# Altium PCB LED.PcbDoc
Units mm, origin at the board's own origin, x right, y up, seen from the top; angles counter-clockwise.
Board outline 125 x 75 mm, 2 copper layers (Top Layer, Bottom Layer), stack 1.571 mm thick; 128 components, 191 nets, 480 pads, 77 vias.
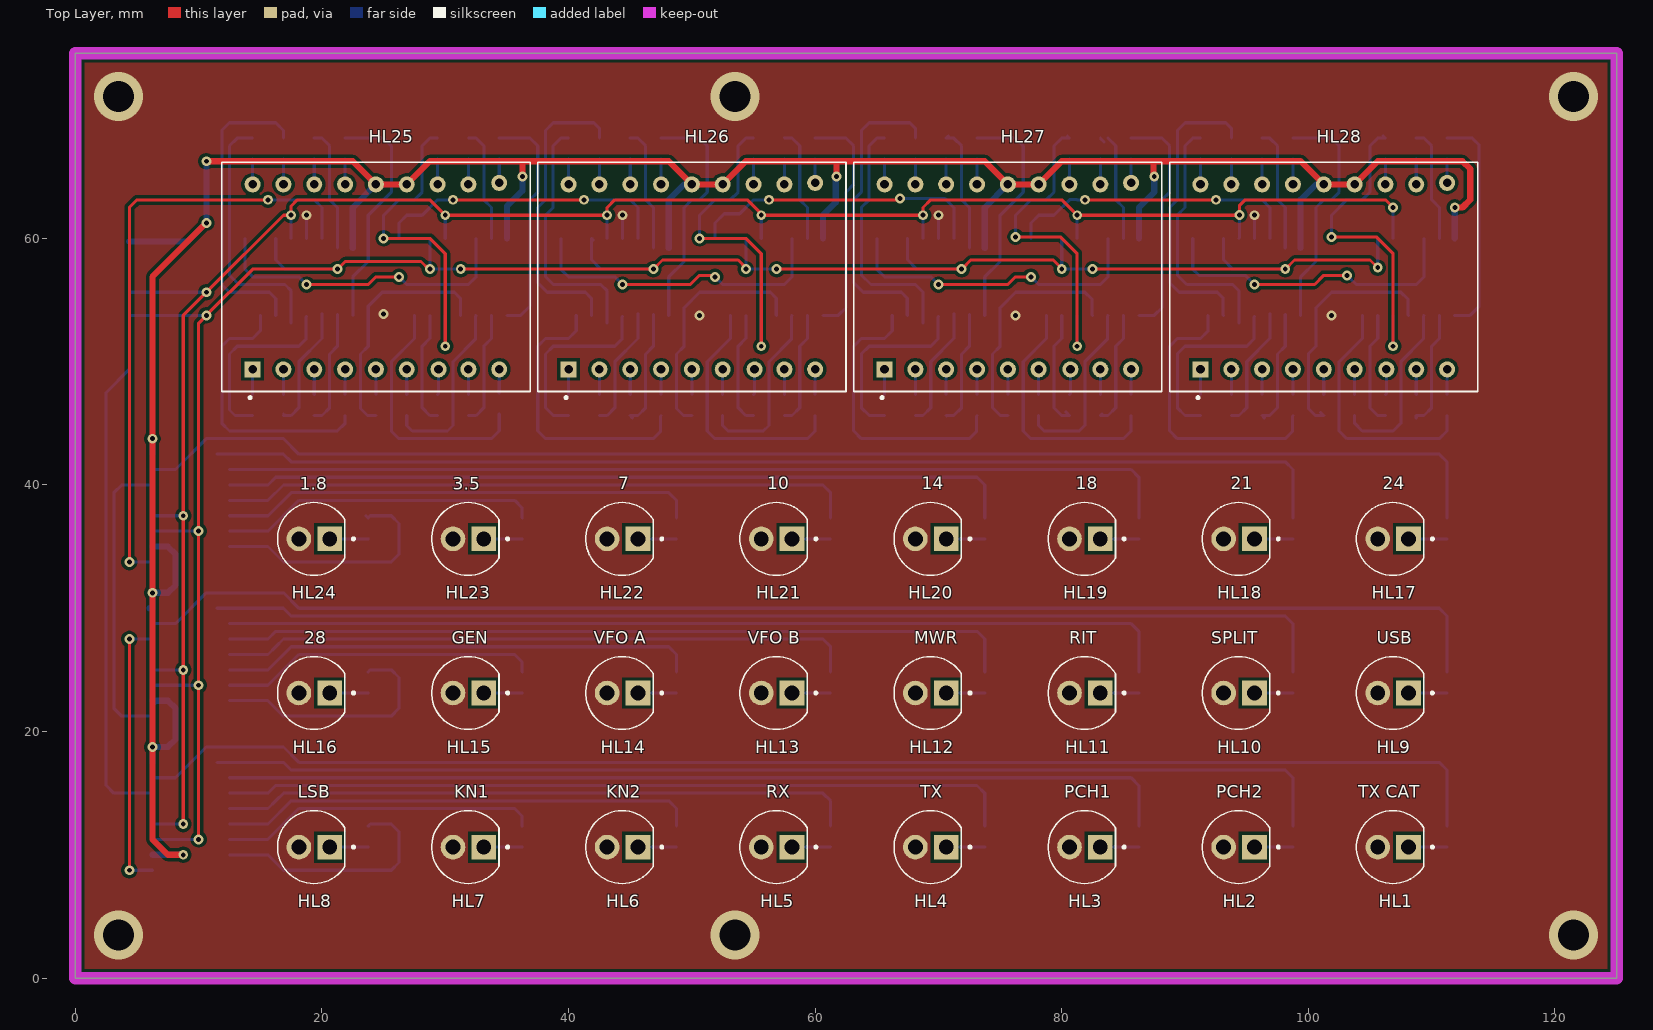
[diagram p0: Top Layer view]
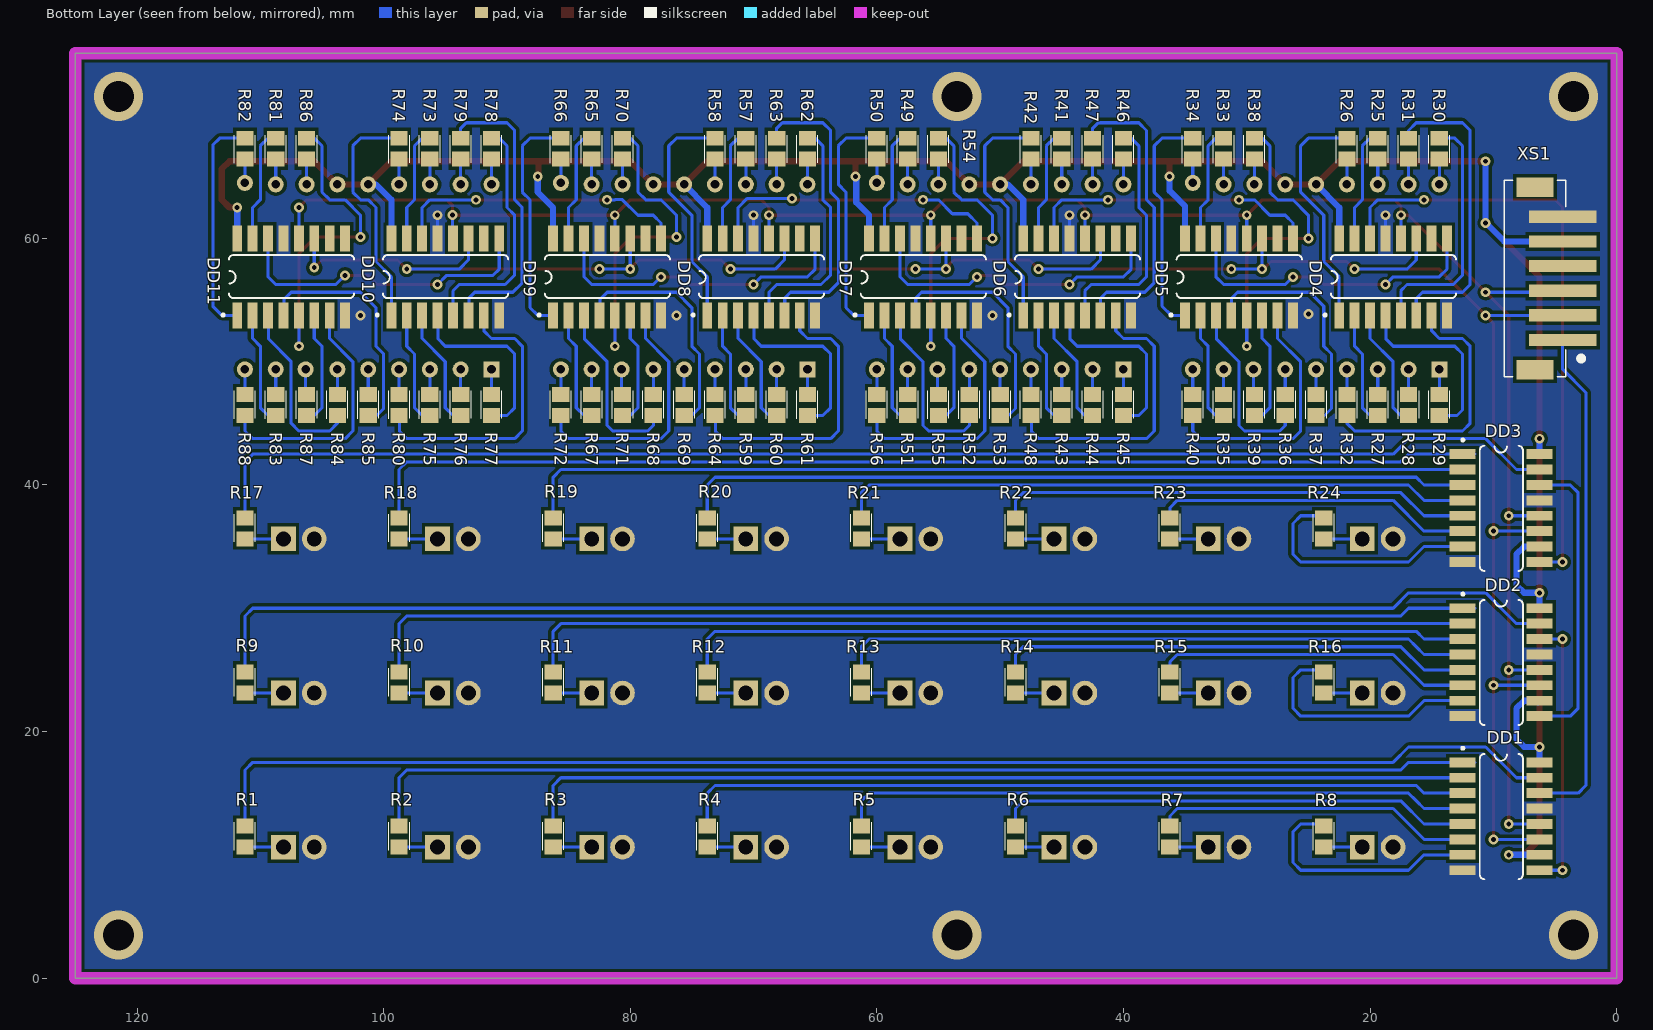
[diagram p1: Bottom Layer view, seen from below]
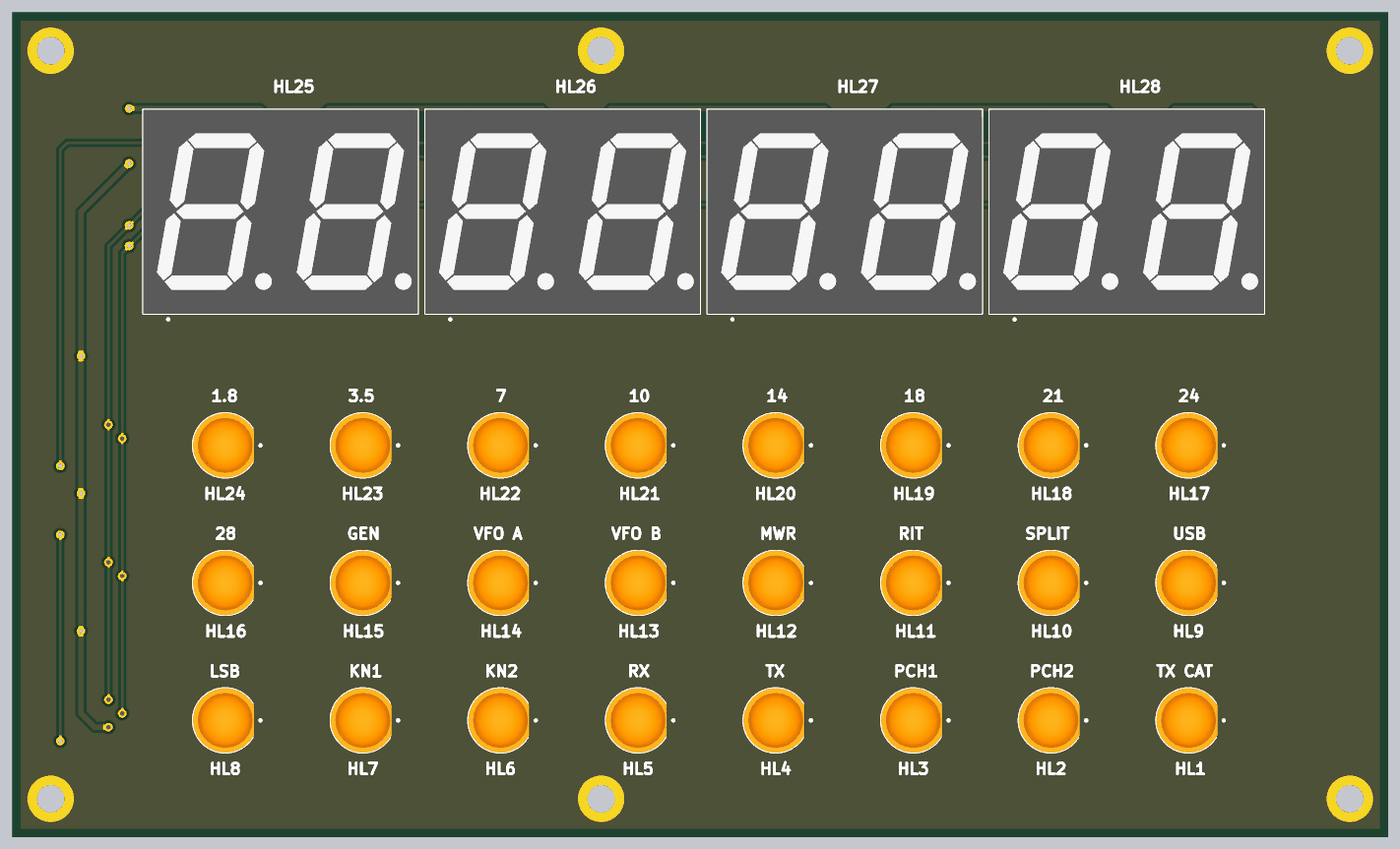
[diagram p2: 3D render of the assembled board from above, using the file's embedded part models]
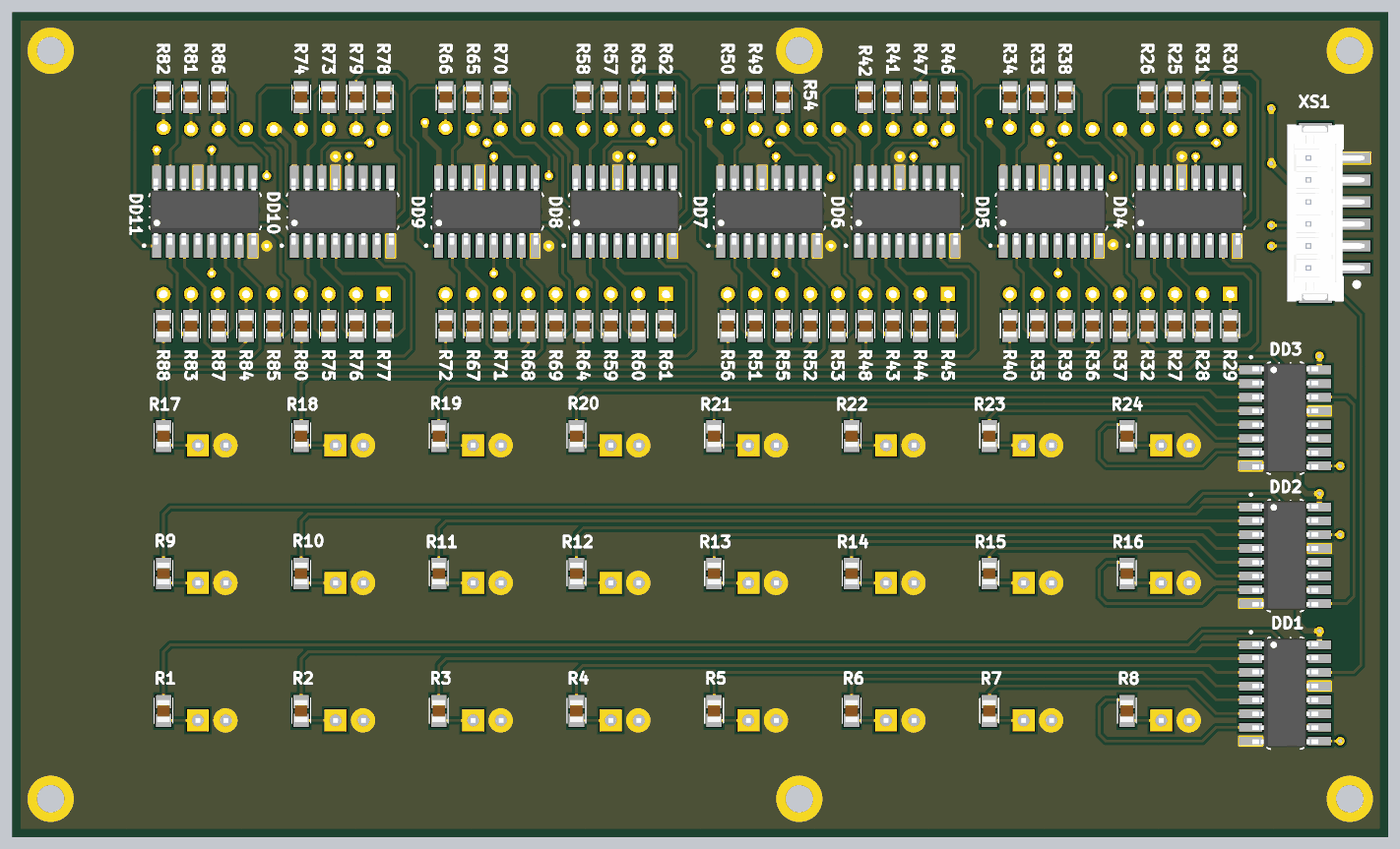
[diagram p3: 3D render of the assembled board from below, using the file's embedded part models]

## Layer stack, top to bottom
Top Solder: solder mask 0.0102, Solder Resist, Dk 3.5
Top Layer: signal copper 0.0356
Dielectric 1: dielectric 1.5, FR-4, Dk 4.8
Bottom Layer: signal copper 0.0356
Bottom Solder: solder mask 0.0102, Solder Resist, Dk 3.5

## Board outline
0,0 0,75 125,75 125,0

## Design rules (kind name [scope] priority, off if disabled: settings)
Clearance [All] p1: gap=0.254 ignorepadtopadclearanceinfootprint=FALSE except(0: Arc-Hole Track-Hole SMDPad-Hole THPad-Hole Via-Hole Fill-Hole Poly-Hole Region-Hole Text-Hole)
MinimumSolderMaskSliver [All] p1: minsoldermaskwidth=0.15
PolygonConnect [All] p1: connectstyle=Direct reliefconductorwidth=0.254 reliefentries=4 polygonreliefangle="90 Angle" airgapwidth=0.254
RoutingVias [All] p1: holewidth=0.711 width=1.27 viastyle="Through Hole" minholewidth=0.711 minwidth=1.27 maxholewidth=0.711 maxwidth=1.27
SilkToSolderMaskClearance [IsPad] p1: minsilkscreentomaskgap=0.1 clearancetoexposedcopper=TRUE
SolderMaskExpansion [All] p1: expansion=0.102 istentingtop=FALSE
Width [All] p1: maxlimit=0.5 minlimit=0.25 preferedwidth=0.25
28 further rules are at their usual default settings.

## Classes and differential pairs
component class LED: DD2 DD3 DD4 DD5 DD6 DD7 DD8 DD9 DD10 DD11 HL17 HL18 HL19 HL20 HL21 HL22 HL23 HL24 HL25 HL26 HL27 HL28 R9 R10 R11 R12 R13 R14 R15 R17 R18 R19 R20 R21 R22 R23 R24 R25 R26 R27 R28 R29 R30 R31 R32 R33 R34 R35 R36 R37 R38 R39 R40 R41 R42 R43 R44 R45 R46 R47 R48 R49 R50 R51 R52 R53 R54 R55 R56 R57 R58 R59 R60 R61 R62 R63 R64 R65 R66 R67 R68 R69 R70 R71 R72 R73 R74 R75 R76 R77 R78 R79 R80 R81 R82 R83 R84 R85 R86 R87 R88 XS1

## Components (designator, comment, footprint, x,y, rotation, side; value= is the part's Value field where it differs from the comment)
DD1 "74HC595D" 74HC595 9.375,13.126 r270 bottom
DD2 "74HC595D" 74HC595 9.375,25.625 r270 bottom
DD3 "74HC595D" 74HC595 9.375,38.125 r270 bottom
DD4 "74HC595D" 74HC595 18.125,56.875 r180 bottom
DD5 "74HC595D" 74HC595 30.625,56.875 r180 bottom
DD6 "74HC595D" 74HC595 43.75,56.875 r180 bottom
DD7 "74HC595D" 74HC595 56.25,56.875 r180 bottom
DD8 "74HC595D" 74HC595 69.375,56.875 r180 bottom
DD9 "74HC595D" 74HC595 81.875,56.875 r180 bottom
DD10 "74HC595D" 74HC595 95,56.875 r180 bottom
DD11 "74HC595D" 74HC595 107.5,56.875 r180 bottom
HL1 "LED" "LED 3mm" 108.125,10.626 r180 top
HL2 "LED" "LED 3mm" 95.625,10.626 r180 top
HL3 "LED" "LED 3mm" 83.125,10.626 r180 top
HL4 "LED" "LED 3mm" 70.625,10.626 r180 top
HL5 "LED" "LED 3mm" 58.125,10.626 r180 top
HL6 "LED" "LED 3mm" 45.625,10.626 r180 top
HL7 "LED" "LED 3mm" 33.125,10.626 r180 top
HL8 "LED" "LED 3mm" 20.625,10.626 r180 top
HL9 "LED" "LED 3mm" 108.125,23.126 r180 top
HL10 "LED" "LED 3mm" 95.625,23.126 r180 top
HL11 "LED" "LED 3mm" 83.125,23.126 r180 top
HL12 "LED" "LED 3mm" 70.625,23.126 r180 top
HL13 "LED" "LED 3mm" 58.125,23.126 r180 top
HL14 "LED" "LED 3mm" 45.625,23.126 r180 top
HL15 "LED" "LED 3mm" 33.125,23.126 r180 top
HL16 "LED" "LED 3mm" 20.625,23.126 r180 top
HL17 "LED" "LED 3mm" 108.125,35.626 r180 top
HL18 "LED" "LED 3mm" 95.625,35.626 r180 top
HL19 "LED" "LED 3mm" 83.125,35.626 r180 top
HL20 "LED" "LED 3mm" 70.625,35.626 r180 top
HL21 "LED" "LED 3mm" 58.125,35.626 r180 top
HL22 "LED" "LED 3mm" 45.625,35.626 r180 top
HL23 "LED" "LED 3mm" 33.125,35.625 r180 top
HL24 "LED" "LED 3mm" 20.625,35.625 r180 top
HL25 "LED8" LED7x2 24.375,56.875 r0 top
HL26 "LED8" LED7x2 50,56.875 r0 top
HL27 "LED8" LED7x2 75.625,56.875 r0 top
HL28 "LED8" LED7x2 101.25,56.875 r0 top
R1 "res-0.125w" res-0805-0.125 111.25,11.476 r90 bottom
R2 "res-0.125w" res-0805-0.125 98.75,11.476 r90 bottom
R3 "res-0.125w" res-0805-0.125 86.25,11.476 r90 bottom
R4 "res-0.125w" res-0805-0.125 73.75,11.476 r90 bottom
R5 "res-0.125w" res-0805-0.125 61.25,11.476 r90 bottom
R6 "res-0.125w" res-0805-0.125 48.75,11.476 r90 bottom
R7 "res-0.125w" res-0805-0.125 36.25,11.476 r90 bottom
R8 "res-0.125w" res-0805-0.125 23.75,11.476 r90 bottom
R9 "res-0.125w" res-0805-0.125 111.25,23.976 r90 bottom
R10 "res-0.125w" res-0805-0.125 98.75,23.976 r90 bottom
R11 "res-0.125w" res-0805-0.125 86.25,23.976 r90 bottom
R12 "res-0.125w" res-0805-0.125 73.75,23.976 r90 bottom
R13 "res-0.125w" res-0805-0.125 61.25,23.976 r90 bottom
R14 "res-0.125w" res-0805-0.125 48.75,23.976 r90 bottom
R15 "res-0.125w" res-0805-0.125 36.25,23.976 r90 bottom
R16 "res-0.125w" res-0805-0.125 23.75,23.976 r90 bottom
R17 "res-0.125w" res-0805-0.125 111.25,36.476 r90 bottom
R18 "res-0.125w" res-0805-0.125 98.75,36.476 r90 bottom
R19 "res-0.125w" res-0805-0.125 86.25,36.476 r90 bottom
R20 "res-0.125w" res-0805-0.125 73.75,36.476 r90 bottom
R21 "res-0.125w" res-0805-0.125 61.25,36.476 r90 bottom
R22 "res-0.125w" res-0805-0.125 48.75,36.476 r90 bottom
R23 "res-0.125w" res-0805-0.125 36.25,36.476 r90 bottom
R24 "res-0.125w" res-0805-0.125 23.75,36.475 r90 bottom
R25 "res-0.125w" res-0805-0.125 19.375,67.275 r270 bottom
R26 "res-0.125w" res-0805-0.125 21.875,67.275 r270 bottom
R27 "res-0.125w" res-0805-0.125 19.375,46.475 r90 bottom
R28 "res-0.125w" res-0805-0.125 16.875,46.475 r90 bottom
R29 "res-0.125w" res-0805-0.125 14.375,46.475 r90 bottom
R30 "res-0.125w" res-0805-0.125 14.375,67.275 r270 bottom
R31 "res-0.125w" res-0805-0.125 16.875,67.275 r270 bottom
R32 "res-0.125w" res-0805-0.125 21.875,46.475 r90 bottom
R33 "res-0.125w" res-0805-0.125 31.875,67.275 r270 bottom
R34 "res-0.125w" res-0805-0.125 34.375,67.275 r270 bottom
R35 "res-0.125w" res-0805-0.125 31.875,46.475 r90 bottom
R36 "res-0.125w" res-0805-0.125 26.875,46.475 r90 bottom
R37 "res-0.125w" res-0805-0.125 24.375,46.475 r90 bottom
R38 "res-0.125w" res-0805-0.125 29.375,67.275 r270 bottom
R39 "res-0.125w" res-0805-0.125 29.375,46.475 r90 bottom
R40 "res-0.125w" res-0805-0.125 34.375,46.475 r90 bottom
R41 "res-0.125w" res-0805-0.125 45,67.275 r270 bottom
R42 "res-0.125w" res-0805-0.125 47.5,67.275 r270 bottom
R43 "res-0.125w" res-0805-0.125 45,46.475 r90 bottom
R44 "res-0.125w" res-0805-0.125 42.5,46.475 r90 bottom
R45 "res-0.125w" res-0805-0.125 40,46.475 r90 bottom
R46 "res-0.125w" res-0805-0.125 40,67.275 r270 bottom
R47 "res-0.125w" res-0805-0.125 42.5,67.275 r270 bottom
R48 "res-0.125w" res-0805-0.125 47.5,46.475 r90 bottom
R49 "res-0.125w" res-0805-0.125 57.5,67.275 r270 bottom
R50 "res-0.125w" res-0805-0.125 60,67.275 r270 bottom
R51 "res-0.125w" res-0805-0.125 57.5,46.475 r90 bottom
R52 "res-0.125w" res-0805-0.125 52.5,46.475 r90 bottom
R53 "res-0.125w" res-0805-0.125 50,46.475 r90 bottom
R54 "res-0.125w" res-0805-0.125 55,67.275 r270 bottom
R55 "res-0.125w" res-0805-0.125 55,46.475 r90 bottom
R56 "res-0.125w" res-0805-0.125 60,46.475 r90 bottom
R57 "res-0.125w" res-0805-0.125 70.625,67.275 r270 bottom
R58 "res-0.125w" res-0805-0.125 73.125,67.275 r270 bottom
R59 "res-0.125w" res-0805-0.125 70.625,46.475 r90 bottom
R60 "res-0.125w" res-0805-0.125 68.125,46.475 r90 bottom
R61 "res-0.125w" res-0805-0.125 65.625,46.475 r90 bottom
R62 "res-0.125w" res-0805-0.125 65.625,67.275 r270 bottom
R63 "res-0.125w" res-0805-0.125 68.125,67.275 r270 bottom
R64 "res-0.125w" res-0805-0.125 73.125,46.475 r90 bottom
R65 "res-0.125w" res-0805-0.125 83.125,67.275 r270 bottom
R66 "res-0.125w" res-0805-0.125 85.625,67.275 r270 bottom
R67 "res-0.125w" res-0805-0.125 83.125,46.475 r90 bottom
R68 "res-0.125w" res-0805-0.125 78.125,46.475 r90 bottom
R69 "res-0.125w" res-0805-0.125 75.625,46.475 r90 bottom
R70 "res-0.125w" res-0805-0.125 80.625,67.275 r270 bottom
R71 "res-0.125w" res-0805-0.125 80.625,46.475 r90 bottom
R72 "res-0.125w" res-0805-0.125 85.625,46.475 r90 bottom
R73 "res-0.125w" res-0805-0.125 96.25,67.275 r270 bottom
R74 "res-0.125w" res-0805-0.125 98.75,67.275 r270 bottom
R75 "res-0.125w" res-0805-0.125 96.25,46.475 r90 bottom
R76 "res-0.125w" res-0805-0.125 93.75,46.475 r90 bottom
R77 "res-0.125w" res-0805-0.125 91.25,46.475 r90 bottom
R78 "res-0.125w" res-0805-0.125 91.25,67.275 r270 bottom
R79 "res-0.125w" res-0805-0.125 93.75,67.275 r270 bottom
R80 "res-0.125w" res-0805-0.125 98.75,46.475 r90 bottom
R81 "res-0.125w" res-0805-0.125 108.75,67.275 r270 bottom
R82 "res-0.125w" res-0805-0.125 111.25,67.275 r270 bottom
R83 "res-0.125w" res-0805-0.125 108.75,46.475 r90 bottom
R84 "res-0.125w" res-0805-0.125 103.75,46.475 r90 bottom
R85 "res-0.125w" res-0805-0.125 101.25,46.475 r90 bottom
R86 "res-0.125w" res-0805-0.125 106.25,67.275 r270 bottom
R87 "res-0.125w" res-0805-0.125 106.25,46.475 r90 bottom
R88 "res-0.125w" res-0805-0.125 111.25,46.475 r90 bottom
XS1 "Разьем 6 кон." B6B-PH-SM4-TB 4.375,56.75 r90 bottom (schematic designator XP1)

## Footprints (in the part's own frame and the unit in brackets; to place one, negate y for a bottom-side part, rotate by r counter-clockwise, add the part's x,y. Pads: shape width x height; smd on the part's side, far side on the other; paste and mask are expansions set on the pad)
74HC595 [mm]
  rect 0.8x2.1 smd: 1(-4.375,-3.125) 2(-3.125,-3.125) 3(-1.875,-3.125) 4(-0.625,-3.125) 5(0.625,-3.125) 6(1.875,-3.125) 7(3.125,-3.125) 8(4.375,-3.125) 9(4.375,3.125) 10(3.125,3.125) 11(1.875,3.125) 12(0.625,3.125) 13(-0.625,3.125) 14(-1.875,3.125) 15(-3.125,3.125) 16(-4.375,3.125)
  silkscreen extent -5.62,-3.2 5.1,1.78, body extent -4.95,-3 4.95,3, height 1.75
B6B-PH-SM4-TB [mm]
  rect 1x5.5 smd: 1(-5,0) 2(-3,0) 3(-1,0) 4(1,0) 5(3,0) 6(5,0)
  rect 1.6x3 smd: P1(-7.4,2.25) P2(7.4,2.25)
  silkscreen extent -7.98,-1.7 7.98,4.75, body extent -7.98,-2.21 7.98,4.79, height 6.75
LED7x2 [mm]
  rect 1.3x1.3 hole 0.7: 1(-10,-7.5)
  round 1.3 hole 0.7: 2(-7.5,-7.5) 3(-5,-7.5) 4(-2.5,-7.5) 5(0,-7.5) 6(2.5,-7.5) 7(5.08,-7.5) 8(7.5,-7.5) 9(10,-7.5) 10(10,7.62) 11(7.5,7.5) 12(5,7.5) 13(2.5,7.5) 14(0,7.5) 15(-2.5,7.5) 16(-5,7.5) 17(-7.5,7.5) 18(-10,7.5)
  silkscreen extent -12.5,-9.9 12.5,9.3, body extent -12.5,-9.3 12.5,9.3, height 8.06
"LED 3mm" [mm]
  rect 2x2 hole 1.2: 1(0,0)
  round 2 hole 1.2: 2(2.5,0)
  silkscreen extent -2.03,-2.96 4.23,2.96, body extent -1.33,-2.95 4.21,2.95, height 14.1
res-0805-0.125 [mm]
  rect 1.2x1.4 smd: 1(-0.85,0) 2(0.85,0)
  silkscreen extent -1.1,-0.85 1.17,0.85, body extent -1,-0.6 1,0.6, height 0.95

## Part data
HL1: "TX CAT"
HL2: "PCH2"
HL3: "PCH1"
HL4: "TX"
HL5: "RX"
HL6: "KN2"
HL7: "KN1"
HL8: "LSB"
HL9: "USB"
HL10: "SPLIT"
HL11: "RIT"
HL12: "MWR"
HL13: "VF0 B"
HL14: "VF0 A"
HL15: "GEN"
HL16: "28"
HL17: "24"
HL18: "21"
HL19: "18"
HL20: "14"
HL21: "10"
HL22: "7"
HL23: "3.5"
HL24: "1.8"
XS1: System=Connector

## Via types
v1: diameter 0.8, hole 0.4, Top Layer to Bottom Layer, 71 vias
v2: diameter 4, hole 2.5, Top Layer to Bottom Layer, 6 vias

## Nets (pads, with @x,y where several pads share a name; then routed paths per layer and width w, separated by ;. In a path a pad name is that pad's centre, name@x,y a point inside that pad or via, vN(x,y) a via of type N, cw(c..) or ccw(c..) an arc to the next point about the centre after c; other vN are vias at no path point)
"+5 В": DD1.10 DD1.16 DD2.10 DD2.16 DD3.10 DD3.16 DD4.16 DD5.16 DD6.16 DD7.16 DD8.16 DD9.16 DD10.16 DD11.16 HL25.13 HL25.14 HL26.13 HL26.14 HL27.13 HL27.14 HL28.13 HL28.14 XS1.5 | length 247.3
  Top Layer w0.5: v1(8.75,10.001) 7.5,10.001 6.25,11.251 v1(6.25,18.751) v1(6.25,31.25) v1(6.25,43.751) 6.25,56.875 v1(10.625,61.25) ; v1(10.625,66.25) 22.5,66.25 HL25.14 HL25.13 28.75,66.25 36.25,66.25 ; v1(36.25,65) 36.25,66.25 ; v1(61.721,65) 61.721,66.096 61.875,66.25 ; v1(87.5,65) 87.443,65.057 87.443,65.75 87.443,66.25 ; v1(111.875,62.5) 112.501,62.501 113.125,63.125 113.125,65.625 112.5,66.25 105.625,66.25 HL28.13 HL28.14 99.375,66.25 87.443,66.25 ; 36.25,66.25 48.125,66.25 HL26.14 HL26.13 54.375,66.25 61.875,66.25 ; 61.875,66.25 73.75,66.25 HL27.14 HL27.13 80,66.25 87.443,66.25
  Bottom Layer w0.5: XS1.5 9.125,59.75 10.624,61.249 v1(10.625,66.25) ; DD2.16@6,30 DD2.16@6.1,30 ; DD1.16 v1(6.25,18.751) 7.5,18.751 8.125,19.376 8.125,21.875 7.5,22.5 DD2.10 DD2.10@6.38,22.37 ; DD2.16 DD2.16@6.1,30 ; DD3.10 7.5,35 8.125,34.375 8.125,31.875 7.5,31.25 v1(6.25,31.25) 6.25,30.15 DD2.16@6.1,30 ; DD3.16 v1(6.25,43.751) ; DD1.10 v1(8.75,10.001) ; DD4.16@22.5,59.203 22.5,62.5 HL25.14 ; DD5.16 35,62.6 36.25,63.85 v1(36.25,65) ; DD6.16@48.125,59.203 48.125,63.125 49.375,64.375 HL26.14 ; DD7.16 60.625,61.875 61.664,62.914 61.664,64.943 v1(61.721,65) ; DD8.16@73.75,59.203 73.75,62.5 HL27.14 ; DD9.16 86.25,62.5 87.496,63.746 87.496,64.996 v1(87.5,65) ; DD10.16@99.375,59.203 99.375,63.125 100.625,64.375 HL28.14 ; DD11.16 v1(111.875,62.5)
CLK: DD1.11 DD2.11 DD3.11 DD4.11 DD5.11 DD6.11 DD7.11 DD8.11 DD9.11 DD10.11 DD11.11 XS1.2 | length 198.2
  Top Layer w0.25: v1(10,11.251) v1(10,23.751) v1(10,36.251) ; 10,35 10,53.125 v1(10.625,53.75) 14.375,57.5 v1(21.25,57.5) 21.875,58.125 28.033,58.125 28.658,57.5 v1(28.75,57.5) ; v1(31.25,57.5) v1(46.875,57.5) 47.62,58.245 53.75,58.245 54.375,57.62 v1(54.375,57.5) ; v1(56.875,57.5) v1(71.875,57.5) 72.62,58.245 79.31,58.245 80,57.555 v1(80,57.5) ; v1(82.5,57.5) v1(98.125,57.5) 98.87,58.245 105,58.245 v1(105.625,57.62)
  Bottom Layer w0.25: XS1.2 v1(10.625,53.75) ; DD3.11 v1(10,36.251) ; DD1.11 v1(10,11.251) ; DD2.11 v1(10,23.751) ; DD4.11 16.25,58.245 16.995,57.5 v1(21.25,57.5) ; DD5.11 v1(28.75,57.5) v1(31.25,57.5) ; DD6.11@42.024,59.852 DD6.11 41.875,58.245 42.62,57.5 v1(46.875,57.5) ; DD7.11 v1(54.375,57.5) v1(56.875,57.5) ; DD8.11 67.5,58.245 68.245,57.5 v1(71.875,57.5) ; DD9.11 v1(80,57.5) v1(82.5,57.5) ; DD10.11 93.125,58.245 93.87,57.5 v1(98.125,57.5) ; v1(105.625,57.62) DD11.11
DATA: DD1.14 XS1.1 | length 40.9
  Bottom Layer w0.25: XS1.1 4.375,49.375 2.5,47.5 2.5,15.626 3.125,15.001 DD1.14
GND: DD1.8 DD1.13 DD2.8 DD2.13 DD3.8 DD3.13 DD4.8 DD4.13 DD5.8 DD5.13 DD6.8 DD6.13 DD7.8 DD7.13 DD8.8 DD8.13 DD9.8 DD9.13 DD10.8 DD10.13 DD11.8 DD11.13 HL1.2 HL2.2 HL3.2 HL4.2 HL5.2 HL6.2 HL7.2 HL8.2 HL9.2 HL10.2 HL11.2 HL12.2 HL13.2 HL14.2 HL15.2 HL16.2 HL17.2 HL18.2 HL19.2 HL20.2 HL21.2 HL22.2 HL23.2 HL24.2 XS1.6 | length 7.5
  Bottom Layer w0.25: DD4.13 v1(18.75,61.875) ; DD6.13@44.375,60 v1(44.375,61.875) ; DD8.13 v1(70,61.875) ; DD10.13 v1(95.625,61.875)
  other v1: 50.625,53.75 76.25,53.75 101.875,53.75 25,53.87
  other v2: 3.5,3.5 53.5,3.5 121.5,3.5 3.5,71.5 53.5,71.5 121.5,71.5
NetDD1_1: DD1.1 R2.2 | length 91.7
  Bottom Layer w0.25: DD1.1@11.485,17.501 16.876,17.501 17.5,16.876 98.125,16.876 98.75,16.251 R2.2
NetDD1_2: DD1.2 R3.2 | length 77.3
  Bottom Layer w0.25: DD1.2 85.625,16.251 86.25,15.626 R3.2
NetDD1_3: DD1.3 R4.2 | length 64.4
  Bottom Layer w0.25: DD1.3 15.625,15.001 16.25,15.626 73.125,15.626 73.75,15.001 R4.2
NetDD1_4: DD1.4 R5.2 | length 51.6
  Bottom Layer w0.25: DD1.4 15.625,13.751 16.25,14.376 16.874,15.001 60.625,15.001 61.25,14.376 R5.2
NetDD1_5: DD1.5 R6.2 | length 38.7
  Bottom Layer w0.25: DD1.5 15.624,12.501 17.5,14.376 48.124,14.376 48.75,13.751 R6.2
NetDD1_6: DD1.6 R7.2 | length 25.8
  Bottom Layer w0.25: DD1.6 15.624,11.251 18.125,13.751 35.624,13.751 36.221,13.155 36.221,12.356 R7.2
NetDD1_7: DD1.7 R8.2 | length 19.9
  Bottom Layer w0.25: DD1.7 15.625,10.001 16.876,8.75 25.625,8.75 26.25,9.375 26.25,11.875 25.625,12.5 23.924,12.5 R8.2
NetDD1_9: DD1.9 DD2.14 | length 22.5
  Top Layer w0.25: v1(4.375,8.751) v1(4.375,27.5)
  Bottom Layer w0.25: v1(4.375,8.751) DD1.9@6.25,8.751 ; v1(4.375,27.5) DD2.14
NetDD1_15: DD1.15 R1.2 | length 111.4
  Bottom Layer w0.25: DD1.15 8.126,16.251 10.625,18.751 16.876,18.751 18.125,17.501 110.625,17.501 111.25,16.876 R1.2
NetDD2_1: DD2.1 R10.2 | length 91.7
  Bottom Layer w0.25: DD2.1@11.485,30 16.876,30 17.5,29.376 98.125,29.376 98.75,28.751 R10.2
NetDD2_2: DD2.2 R11.2 | length 77.3
  Bottom Layer w0.25: DD2.2 85.625,28.751 86.25,28.125 R11.2
NetDD2_3: DD2.3 R12.2 | length 64.4
  Bottom Layer w0.25: DD2.3 15.625,27.501 16.25,28.126 73.125,28.126 73.75,27.501 R12.2
NetDD2_4: DD2.4 R13.2 | length 51.6
  Bottom Layer w0.25: DD2.4 15.625,26.251 16.25,26.876 16.874,27.5 60.625,27.5 61.25,26.875 R13.2
NetDD2_5: DD2.5 R14.2 | length 38.7
  Bottom Layer w0.25: DD2.5 15.626,25.001 17.501,26.876 48.124,26.876 48.75,26.25 R14.2
NetDD2_6: DD2.6 R15.2 | length 25.8
  Bottom Layer w0.25: DD2.6 15.626,23.751 18.126,26.251 35.624,26.251 36.221,25.655 36.221,24.856 R15.2
NetDD2_7: DD2.7 R16.2 | length 19.9
  Bottom Layer w0.25: DD2.7 15.625,22.501 16.875,21.25 25.625,21.25 26.25,21.875 26.25,24.375 25.625,25 23.924,25 R16.2
NetDD2_9: DD2.9 DD3.14 | length 24.3
  Bottom Layer w0.25: DD2.9 3.75,21.25 3.125,21.876 3.125,39.376 3.75,40 DD3.14@6.25,40
NetDD2_15: DD2.15 R9.2 | length 111.4
  Bottom Layer w0.25: DD2.15@6.25,28.751 8.126,28.751 10.625,31.25 16.876,31.25 18.125,30.001 110.625,30.001 111.25,29.376 R9.2
NetDD3_1: DD3.1 R18.2 | length 91.7
  Bottom Layer w0.25: DD3.1@11.485,42.5 16.876,42.5 17.5,41.876 98.125,41.876 98.75,41.251 R18.2
NetDD3_2: DD3.2 R19.2 | length 77.3
  Bottom Layer w0.25: DD3.2 85.625,41.251 86.25,40.625 R19.2
NetDD3_3: DD3.3 R20.2 | length 64.4
  Bottom Layer w0.25: DD3.3 15.625,40.001 16.25,40.626 73.125,40.626 73.75,40.001 R20.2
NetDD3_4: DD3.4 R21.2 | length 51.6
  Bottom Layer w0.25: DD3.4 15.626,38.751 16.875,40 60.625,40 61.25,39.375 R21.2
NetDD3_5: DD3.5 R22.2 | length 38.7
  Bottom Layer w0.25: DD3.5 15.626,37.501 17.501,39.376 48.124,39.376 48.75,38.75 R22.2
NetDD3_6: DD3.6 R23.2 | length 25.8
  Bottom Layer w0.25: DD3.6 15.626,36.251 18.126,38.751 35.624,38.751 36.221,38.155 36.221,37.356 R23.2
NetDD3_7: DD3.7 R24.2 | length 20.1
  Bottom Layer w0.25: DD3.7 15.624,35.001 16.876,33.749 25.625,33.749 26.25,34.374 26.25,36.874 25.625,37.499 23.924,37.499 R24.2 R24.2@23.576,37.499
NetDD3_9: DD3.9 DD4.14 | length 49.3
  Top Layer w0.25: v1(4.375,33.75) 4.375,62.5 5,63.125 v1(15.625,63.125)
  Bottom Layer w0.25: v1(4.375,33.75) DD3.9 ; v1(15.625,63.125) 19.375,63.125 20,62.5 DD4.14
NetDD3_15: DD3.15 R17.2 | length 111.4
  Bottom Layer w0.25: DD3.15 8.125,41.251 10.625,43.75 16.876,43.75 18.125,42.501 110.625,42.501 111.25,41.876 R17.2
NetDD4_1: DD4.1 R26.1 | length 19.1
  Bottom Layer w0.25: R26.1 25,68.125 25.625,67.5 25.625,63.75 23.75,61.875 23.75,58.125 22.5,56.875 DD4.1
NetDD4_2: DD4.2 R27.1 | length 9.3
  Bottom Layer w0.25: R27.1 20,45.625 20.625,46.25 20.625,50.625 21.25,51.25 DD4.2@21.25,53.824
NetDD4_3: DD4.3 R28.1 | length 10
  Bottom Layer w0.25: R28.1 17.5,45.625 18.125,46.25 18.125,50 20,51.875 DD4.3@20,53.917 ; R28.1@16.875,45.745 R28.1@16.935,45.685
NetDD4_4: DD4.4 R29.1 | length 15.2
  Bottom Layer w0.25: R29.1 12.95,45.625 12.5,46.075 12.5,50.625 13.125,51.25 18.125,51.25 18.718,51.843 18.718,53.633 DD4.4@18.75,53.665
NetDD4_5: DD4.5 R30.1 | length 20.8
  Bottom Layer w0.25: R30.1 13.125,68.125 12.5,67.5 12.5,56.995 13.245,56.25 16.995,56.25 17.5,55.745 DD4.5@17.5,53.125
NetDD4_6: DD4.6 R31.1 | length 24.9
  Bottom Layer w0.25: DD4.6 16.25,55.12 15.745,55.625 12.5,55.625 11.875,56.25 11.875,68.75 12.5,69.375 16.25,69.375 16.875,68.75 R31.1
NetDD4_7: DD4.7 R32.1 | length 22.3
  Bottom Layer w0.25: DD4.7 15,52.5 14.375,51.875 12.5,51.875 11.875,51.25 11.875,45 12.5,44.375 21.25,44.375 21.875,45 R32.1
NetDD4_9: DD4.9 DD5.14 | length 25.7
  Top Layer w0.25: v1(18.75,56.25) 23.75,56.25 24.375,56.875 v1(26.25,56.875)
  Bottom Layer w0.25: DD4.9 13.75,57.5 14.375,56.875 18.125,56.875 v1(18.75,56.25) ; v1(26.25,56.875) 26.875,56.25 31.875,56.25 32.5,56.875 DD5.14
NetDD4_15: DD4.15 R25.1 | length 10
  Bottom Layer w0.25: R25.1 20,68.125 20.625,67.5 20.625,63.125 21.25,62.5 DD4.15@21.25,59.225
NetDD5_1: DD5.1 R34.1 | length 18.8
  Bottom Layer w0.25: R34.1 36.875,68.125 37.5,67.5 37.5,63.75 36.875,63.125 36.875,54.495 36.13,53.75 DD5.1
NetDD5_2: DD5.2 R35.1 | length 9.3
  Bottom Layer w0.25: R35.1 32.5,45.625 33.125,46.25 33.125,51.25 33.75,51.875 DD5.2
NetDD5_3: DD5.3 R36.1 | length 14.6
  Bottom Layer w0.25: R36.1 26.875,44.825 27.325,44.375 30.175,44.375 30.625,44.825 30.625,50 32.468,51.843 32.468,53.718 DD5.3
NetDD5_4: DD5.4 R37.1 | length 19.6
  Bottom Layer w0.25: R37.1 23.695,45.625 23.125,46.195 23.125,50.625 23.75,51.25 23.75,54.495 24.88,55.625 30.745,55.625 31.218,55.152 31.218,53.782 DD5.4
NetDD5_5: DD5.5 R38.1 | length 26.6
  Top Layer w0.25: v1(25,60) 28.75,60 30,58.75 v1(30,51.25)
  Bottom Layer w0.25: v1(25,60) 25,61.875 26.25,63.125 27.5,63.125 28.125,63.75 28.125,67.5 28.75,68.125 R38.1 ; v1(30,51.25) DD5.5
NetDD5_6: DD5.6 R39.1 | length 9.3
  Bottom Layer w0.25: DD5.6 28.75,51.875 28.125,51.25 28.125,46.25 28.75,45.625 R39.1
NetDD5_7: DD5.7 R40.1 | length 20.8
  Bottom Layer w0.25: DD5.7 27.5,51.875 25.625,50 25.625,44.375 26.25,43.75 33.75,43.75 34.375,44.375 R40.1@34.375,45.745
NetDD5_9: DD5.9 DD6.14 | length 24.2
  Top Layer w0.25: v1(30.625,63.125) v1(41.25,63.125)
  Bottom Layer w0.25: DD5.9 26.25,61.25 26.875,61.875 28.125,61.875 29.375,63.125 v1(30.625,63.125) ; v1(41.25,63.125) 45,63.125 45.625,62.5 DD6.14
NetDD5_15: DD5.15 R33.1 | length 9.3
  Bottom Layer w0.25: R33.1 32.5,68.125 33.125,67.5 33.125,63.125 33.75,62.5 DD5.15
NetDD6_1: DD6.1 R42.1 | length 19.4
  Bottom Layer w0.25: R42.1 50.625,68.125 51.25,67.5 51.25,63.75 50.625,63.125 50,63.125 49.375,62.5 49.375,58.125 48.125,56.875 DD6.1
NetDD6_2: DD6.2 R43.1 | length 9.6
  Bottom Layer w0.25: R43.1@45.175,45.45 R43.1 45.625,45.625 46.25,46.25 46.25,50.625 46.875,51.25 DD6.2@46.875,53.824
NetDD6_3: DD6.3 R44.1 | length 10
  Bottom Layer w0.25: R44.1 43.125,45.625 43.75,46.25 43.75,50 45.625,51.875 DD6.3@45.625,53.917
NetDD6_4: DD6.4 R45.1 | length 15.1
  Bottom Layer w0.25: R45.1 38.75,45.625 38.125,46.25 38.125,50.625 38.75,51.25 43.75,51.25 44.343,51.843 44.343,53.633 DD6.4@44.375,53.665
NetDD6_5: DD6.5 R46.1 | length 20.5
  Bottom Layer w0.25: R46.1 39.375,68.125 38.75,67.5 38.75,62.5 38.125,61.875 38.125,56.875 38.75,56.25 42.62,56.25 43.125,55.745 DD6.5@43.125,53.125
NetDD6_6: DD6.6 R47.1 | length 24.5
  Bottom Layer w0.25: DD6.6 41.843,53.782 41.843,55.152 41.37,55.625 38.271,55.625 37.5,56.396 37.5,62.5 38.125,63.125 38.125,68.75 38.75,69.375 42.05,69.375 42.5,68.925 R47.1
NetDD6_7: DD6.7 R48.1 | length 23.5
  Bottom Layer w0.25: DD6.7 40.625,52.5 40,51.875 38.125,51.875 37.5,51.25 37.5,44.375 38.125,43.75 46.875,43.75 47.468,44.343 47.468,45.593 R48.1
NetDD6_9: DD6.9 DD7.14 | length 25.8
  Top Layer w0.25: v1(44.375,56.25) 49.88,56.25 50.625,56.995 51.106,56.995 51.121,56.98 51.77,56.98 v1(51.875,56.875)
  Bottom Layer w0.25: DD6.9 39.375,57.5 40,56.875 43.75,56.875 v1(44.375,56.25) ; v1(51.875,56.875) 52.5,56.25 57.5,56.25 58.125,56.875 DD7.14@58.125,60
NetDD6_15: DD6.15 R41.1 | length 10.1
  Bottom Layer w0.25: R41.1@45.026,68.151 R41.1 45.625,68.125 46.25,67.5 46.25,63.125 46.875,62.5 DD6.15@46.875,59.225
NetDD7_1: DD7.1 R50.1 | length 18.9
  Bottom Layer w0.25: R50.1 62.5,68.125 63.125,67.5 63.125,64.375 62.5,63.75 62.5,54.375 61.875,53.75 DD7.1
NetDD7_2: DD7.2 R51.1 | length 9.3
  Bottom Layer w0.25: R51.1 58.125,45.625 58.75,46.25 58.75,51.25 59.375,51.875 DD7.2
NetDD7_3: DD7.3 R52.1 | length 14.6
  Bottom Layer w0.25: R52.1 52.5,44.825 52.95,44.375 55.8,44.375 56.25,44.825 56.25,50 58.093,51.843 58.093,53.718 DD7.3@58.125,53.75
NetDD7_4: DD7.4 R53.1 | length 19.5
  Bottom Layer w0.25: R53.1 49.32,45.625 48.75,46.195 48.75,50.625 49.375,51.25 49.375,54.375 50.625,55.625 56.37,55.625 56.843,55.152 56.843,53.782 DD7.4
NetDD7_5: DD7.5 R54.1 | length 26.6
  Top Layer w0.25: v1(50.625,60) 54.375,60 55.625,58.75 v1(55.625,51.25)
  Bottom Layer w0.25: v1(50.625,60) 50.625,61.875 51.875,63.125 53.125,63.125 53.75,63.75 53.75,67.5 54.375,68.125 R54.1 ; v1(55.625,51.25) DD7.5
NetDD7_6: DD7.6 R55.1 | length 9.3
  Bottom Layer w0.25: DD7.6 54.375,51.875 53.75,51.25 53.75,46.25 54.375,45.625 R55.1
NetDD7_7: DD7.7 R56.1 | length 20.7
  Bottom Layer w0.25: DD7.7 53.125,51.875 51.25,50 51.25,44.375 51.875,43.75 59.375,43.75 60,44.375 R56.1
NetDD7_9: DD7.9 DD8.14 | length 24.3
  Top Layer w0.25: v1(56.25,63.125) 66.606,63.125 66.726,63.245 v1(66.875,63.245)
  Bottom Layer w0.25: DD7.9 51.875,61.25 52.62,61.995 53.87,61.995 55,63.125 v1(56.25,63.125) ; v1(66.875,63.245) 70.505,63.245 71.25,62.5 DD8.14
NetDD7_15: DD7.15 R49.1 | length 9.3
  Bottom Layer w0.25: R49.1@57.526,68.151 R49.1 58.125,68.125 58.75,67.5 58.75,63.125 59.375,62.5 DD7.15
NetDD8_1: DD8.1 R58.1 | length 19.1
  Bottom Layer w0.25: R58.1 76.25,68.125 76.875,67.5 76.875,63.75 75,61.875 75,58.125 73.75,56.875 DD8.1
NetDD8_2: DD8.2 R59.1 | length 9.4
  Bottom Layer w0.25: R59.1@70.651,45.599 R59.1 71.25,45.625 71.875,46.25 71.875,50.625 72.5,51.25 DD8.2@72.5,53.824
NetDD8_3: DD8.3 R60.1 | length 10
  Bottom Layer w0.25: R60.1 68.75,45.625 69.375,46.25 69.375,50 71.25,51.875 DD8.3@71.25,53.917
NetDD8_4: DD8.4 R61.1 | length 15.1
  Bottom Layer w0.25: R61.1 64.375,45.625 63.75,46.25 63.75,50.625 64.375,51.25 69.375,51.25 69.968,51.843 69.968,53.633 DD8.4@70,53.665
NetDD8_5: DD8.5 R62.1 | length 20.3
  Bottom Layer w0.25: R62.1 65,68.125 64.375,67.5 64.375,63.125 63.75,62.5 63.75,57.021 64.521,56.25 68.125,56.25 68.75,55.625 DD8.5@68.75,53.125
NetDD8_6: DD8.6 R63.1 | length 24.5
  Bottom Layer w0.25: DD8.6 67.468,53.782 67.468,55.152 66.995,55.625 63.896,55.625 63.125,56.396 63.125,63.125 63.75,63.75 63.75,68.75 64.375,69.375 67.675,69.375 68.125,68.925 R63.1
NetDD8_7: DD8.7 R64.1 | length 23.5
  Bottom Layer w0.25: DD8.7 66.25,52.5 65.625,51.875 63.75,51.875 63.125,51.25 63.125,44.375 63.75,43.75 72.5,43.75 73.093,44.343 73.093,45.593 R64.1
NetDD8_9: DD8.9 DD9.14 | length 25.7
  Top Layer w0.25: v1(70,56.25) 75.625,56.25 76.25,56.875 v1(77.5,56.875)
  Bottom Layer w0.25: DD8.9 65,57.5 65.625,56.875 69.375,56.875 v1(70,56.25) ; v1(77.5,56.875) 78.125,56.25 83.125,56.25 83.75,56.875 DD9.14
NetDD8_15: DD8.15 R57.1 | length 10.3
  Bottom Layer w0.25: R57.1@70.8,68.3 R57.1 71.25,68.125 71.875,67.5 71.875,63.125 72.5,62.5 DD8.15 DD8.15@72.5,59.225
NetDD9_1: DD9.1 R66.1 | length 18.9
  Bottom Layer w0.25: R66.1 87.5,68.125 88.125,68.125 88.75,67.5 88.75,63.75 88.125,63.125 88.125,54.375 87.5,53.75 DD9.1
NetDD9_2: DD9.2 R67.1 | length 9.4
  Bottom Layer w0.25: R67.1@83.254,45.754 R67.1 83.75,45.625 84.375,46.25 84.375,51.25 85,51.875 DD9.2
NetDD9_3: DD9.3 R68.1 | length 14.6
  Bottom Layer w0.25: R68.1 78.125,44.825 78.575,44.375 81.425,44.375 81.875,44.825 81.875,50 83.718,51.843 83.718,53.718 DD9.3
NetDD9_4: DD9.4 R69.1 | length 19.4
  Bottom Layer w0.25: R69.1 75,45.625 74.375,46.25 74.375,50.625 75,51.25 75,54.375 76.25,55.625 81.875,55.625 82.468,55.032 82.468,53.782 DD9.4
NetDD9_5: DD9.5 R70.1 | length 26.7
  Top Layer w0.25: v1(76.25,60.12) 79.88,60.12 81.25,58.75 v1(81.25,51.25)
  Bottom Layer w0.25: v1(76.25,60.12) 76.25,61.875 77.5,63.125 78.75,63.125 79.375,63.75 79.375,67.5 80,68.125 R70.1 R70.1@80.45,68.3 ; v1(81.25,51.25) DD9.5
NetDD9_6: DD9.6 R71.1 | length 9.7
  Bottom Layer w0.25: DD9.6 80,51.875 79.375,51.25 79.375,46.25 80,45.625 R71.1 R71.1@80.321,45.929
NetDD9_7: DD9.7 R72.1 | length 20.7
  Bottom Layer w0.25: DD9.7 78.75,51.875 76.875,50 76.875,44.375 77.5,43.75 85,43.75 85.625,44.375 R72.1
NetDD9_9: DD9.9 DD10.14 | length 24.2
  Top Layer w0.25: v1(81.875,63.125) v1(92.5,63.125)
  Bottom Layer w0.25: DD9.9 77.5,61.25 78.125,61.875 79.375,61.875 80.64,63.14 81.235,63.14 81.25,63.125 v1(81.875,63.125) ; v1(92.5,63.125) 96.25,63.125 96.875,62.5 DD10.14
NetDD9_15: DD9.15 R65.1 | length 9.1
  Bottom Layer w0.25: R65.1 R65.1@83.429,67.821 ; R65.1@83.75,68.125 84.375,67.5 84.375,63.125 85,62.5 DD9.15
NetDD10_1: DD10.1 R74.1 | length 19.4
  Bottom Layer w0.25: R74.1 101.875,68.125 102.5,67.5 102.5,63.75 101.875,63.125 101.25,63.125 100.625,62.5 100.625,58.125 99.375,56.875 DD10.1
NetDD10_2: DD10.2 R75.1 | length 9.6
  Bottom Layer w0.25: R75.1@96.425,45.45 R75.1 96.875,45.625 97.5,46.25 97.5,50.625 98.125,51.25 DD10.2 DD10.2@98.125,53.824
NetDD10_3: DD10.3 R76.1 | length 10
  Bottom Layer w0.25: R76.1 94.375,45.625 95,46.25 95,50 96.875,51.875 DD10.3 DD10.3@96.875,53.917
NetDD10_4: DD10.4 R77.1 | length 15.1
  Bottom Layer w0.25: R77.1 90,45.625 89.375,46.25 89.375,50.625 90,51.25 95,51.25 95.593,51.843 95.593,53.633 DD10.4@95.625,53.665
NetDD10_5: DD10.5 R78.1 | length 20.4
  Bottom Layer w0.25: R78.1 90.625,68.125 90,67.5 90,62.5 89.375,61.875 89.375,57.021 90.146,56.25 93.87,56.25 94.375,55.745 DD10.5@94.375,53.125
NetDD10_6: DD10.6 R79.1 | length 24.5
  Bottom Layer w0.25: DD10.6 93.093,53.782 93.093,55.152 92.62,55.625 89.521,55.625 88.783,56.363 88.783,62.533 89.375,63.125 89.375,68.75 90,69.375 93.3,69.375 93.75,68.925 R79.1
NetDD10_7: DD10.7 R80.1 | length 23.5
  Bottom Layer w0.25: DD10.7 91.875,52.5 91.25,51.875 89.375,51.875 88.75,51.25 88.75,44.375 89.375,43.75 98.125,43.75 98.718,44.343 98.718,45.593 R80.1
NetDD10_9: DD10.9 DD11.14 | length 25.8
  Top Layer w0.25: v1(95.625,56.25) 100.505,56.25 101.25,56.995 v1(103.125,56.995)
  Bottom Layer w0.25: DD10.9 90.625,57.5 91.13,56.995 94.88,56.995 v1(95.625,56.25) ; v1(103.125,56.995) 103.87,56.25 108.75,56.25 109.375,56.875 DD11.14
NetDD10_15: DD10.15 R73.1 | length 10
  Bottom Layer w0.25: R73.1 96.875,68.125 97.5,67.5 97.5,63.125 98.125,62.5 DD10.15@98.125,59.225
NetDD11_1: DD11.1 R82.1 | length 18.2
  Bottom Layer w0.25: R82.1 113.3,68.125 113.854,67.571 113.854,54.479 113.125,53.75 DD11.1
NetDD11_2: DD11.2 R83.1 | length 9.4
  Bottom Layer w0.25: R83.1@108.75,45.45 R83.1 109.375,45.625 110,46.25 110,51.25 110.625,51.875 DD11.2
NetDD11_3: DD11.3 R84.1 | length 14.4
  Bottom Layer w0.25: R84.1 103.75,45 104.375,44.375 106.875,44.375 107.5,45 107.5,50 109.343,51.843 109.343,53.718 DD11.3
NetDD11_4: DD11.4 R85.1 | length 19.8
  Bottom Layer w0.25: R85.1@101.001,45.874 R85.1 100.57,45.625 100,46.195 100,50.625 100.625,51.25 100.625,54.375 101.875,55.625 107.5,55.625 108.093,55.032 108.093,53.782 DD11.4
NetDD11_5: DD11.5 R86.1 | length 26.7
  Top Layer w0.25: v1(101.875,60.12) 105.505,60.12 106.875,58.75 v1(106.875,51.25)
  Bottom Layer w0.25: v1(101.875,60.12) 101.875,61.875 103.125,63.125 104.375,63.125 105,63.75 105,67.5 105.625,68.125 R86.1 R86.1@106.075,68.3 ; v1(106.875,51.25) DD11.5
NetDD11_6: DD11.6 R87.1 | length 9.3
  Bottom Layer w0.25: DD11.6 105.625,51.875 105,51.25 105,46.25 105.625,45.625 R87.1
NetDD11_7: DD11.7 R88.1 | length 20.7
  Bottom Layer w0.25: DD11.7 104.375,51.875 102.5,50 102.5,44.375 103.125,43.75 110.625,43.75 111.25,44.375 R88.1
NetDD11_15: DD11.15 R81.1 | length 9.3
  Bottom Layer w0.25: R81.1 109.375,68.125 110,67.5 110,63.125 110.625,62.5 DD11.15
NetHL1_1: HL1.1 R1.1 | length 3.1
  Bottom Layer w0.25: HL1.1 R1.1
NetHL2_1: HL2.1 R2.1 | length 3.1
  Bottom Layer w0.25: HL2.1 R2.1
NetHL3_1: HL3.1 R3.1 | length 3.1
  Bottom Layer w0.25: HL3.1 R3.1
NetHL4_1: HL4.1 R4.1 | length 3.1
  Bottom Layer w0.25: HL4.1 R4.1
NetHL5_1: HL5.1 R5.1 | length 3.1
  Bottom Layer w0.25: HL5.1 R5.1
NetHL6_1: HL6.1 R6.1 | length 3.1
  Bottom Layer w0.25: HL6.1 R6.1
NetHL7_1: HL7.1 R7.1 | length 3.1
  Bottom Layer w0.25: HL7.1 R7.1
NetHL8_1: HL8.1 R8.1 | length 3.1
  Bottom Layer w0.25: HL8.1 R8.1
NetHL9_1: HL9.1 R9.1 | length 3.1
  Bottom Layer w0.25: HL9.1 R9.1
NetHL10_1: HL10.1 R10.1 | length 3.1
  Bottom Layer w0.25: HL10.1 R10.1@98.75,23.126
NetHL11_1: HL11.1 R11.1 | length 3.1
  Bottom Layer w0.25: HL11.1 R11.1
NetHL12_1: HL12.1 R12.1 | length 3.1
  Bottom Layer w0.25: HL12.1 R12.1
NetHL13_1: HL13.1 R13.1 | length 3.1
  Bottom Layer w0.25: HL13.1@58.125,23.126 R13.1
NetHL14_1: HL14.1 R14.1 | length 3.1
  Bottom Layer w0.25: HL14.1 R14.1@48.75,23.126
NetHL15_1: HL15.1 R15.1 | length 3.1
  Bottom Layer w0.25: HL15.1 R15.1
NetHL16_1: HL16.1 R16.1 | length 3.1
  Bottom Layer w0.25: HL16.1 R16.1
NetHL17_1: HL17.1 R17.1 | length 3.1
  Bottom Layer w0.25: HL17.1 R17.1
NetHL18_1: HL18.1 R18.1 | length 3.1
  Bottom Layer w0.25: HL18.1 R18.1
NetHL19_1: HL19.1 R19.1 | length 3.1
  Bottom Layer w0.25: HL19.1 R19.1
NetHL20_1: HL20.1 R20.1 | length 3.1
  Bottom Layer w0.25: HL20.1 R20.1
NetHL21_1: HL21.1 R21.1 | length 3.1
  Bottom Layer w0.25: HL21.1 R21.1
NetHL22_1: HL22.1 R22.1 | length 3.1
  Bottom Layer w0.25: HL22.1 R22.1
NetHL23_1: HL23.1 R23.1 | length 3.1
  Bottom Layer w0.25: HL23.1 R23.1
NetHL24_1: HL24.1 R24.1 | length 3.1
  Bottom Layer w0.25: HL24.1 R24.1
NetHL25_1: HL25.1 R29.2 | length 2.1
  Bottom Layer w0.25: R29.2 HL25.1
NetHL25_2: HL25.2 R28.2 | length 2.1
  Bottom Layer w0.25: R28.2 HL25.2
NetHL25_3: HL25.3 R27.2 | length 2.1
  Bottom Layer w0.25: R27.2 HL25.3
NetHL25_4: HL25.4 R32.2 | length 2.1
  Bottom Layer w0.25: R32.2 HL25.4
NetHL25_5: HL25.5 R37.2 | length 2.1
  Bottom Layer w0.25: R37.2 HL25.5
NetHL25_6: HL25.6 R36.2 | length 2.1
  Bottom Layer w0.25: R36.2 HL25.6
NetHL25_7: HL25.7 R39.2 | length 2.1
  Bottom Layer w0.25: R39.2 29.455,47.405 HL25.7
NetHL25_8: HL25.8 R35.2 | length 2.1
  Bottom Layer w0.25: R35.2 HL25.8
NetHL25_9: HL25.9 R40.2 | length 1.9
  Bottom Layer w0.25: R40.2@34.375,47.445 HL25.9
NetHL25_10: HL25.10 R34.2 | length 1.9
  Bottom Layer w0.25: HL25.10 R34.2
NetHL25_11: HL25.11 R33.2 | length 2.1
  Bottom Layer w0.25: HL25.11 R33.2
NetHL25_12: HL25.12 R38.2 | length 2.1
  Bottom Layer w0.25: HL25.12 R38.2
NetHL25_15: HL25.15 R26.2 | length 2.1
  Bottom Layer w0.25: HL25.15 R26.2
NetHL25_16: HL25.16 R25.2 | length 2.1
  Bottom Layer w0.25: HL25.16 R25.2
NetHL25_17: HL25.17 R31.2 | length 2.1
  Bottom Layer w0.25: HL25.17 R31.2
NetHL25_18: HL25.18 R30.2 | length 2.1
  Bottom Layer w0.25: HL25.18 R30.2
NetHL26_1: HL26.1 R45.2 | length 2.1
  Bottom Layer w0.25: R45.2 HL26.1
NetHL26_2: HL26.2 R44.2 | length 2.1
  Bottom Layer w0.25: R44.2 HL26.2
NetHL26_3: HL26.3 R43.2 | length 2.1
  Bottom Layer w0.25: R43.2 HL26.3
NetHL26_4: HL26.4 R48.2 | length 2.1
  Bottom Layer w0.25: R48.2 HL26.4
NetHL26_5: HL26.5 R53.2 | length 2.1
  Bottom Layer w0.25: R53.2 HL26.5
NetHL26_6: HL26.6 R52.2 | length 2.1
  Bottom Layer w0.25: R52.2 HL26.6
NetHL26_7: HL26.7 R55.2 | length 2.1
  Bottom Layer w0.25: R55.2 55.08,47.405 HL26.7
NetHL26_8: HL26.8 R51.2 | length 2.1
  Bottom Layer w0.25: R51.2 HL26.8
NetHL26_9: HL26.9 R56.2 | length 2.1
  Bottom Layer w0.25: R56.2 HL26.9
NetHL26_10: HL26.10 R50.2 | length 1.9
  Bottom Layer w0.25: HL26.10 R50.2
NetHL26_11: HL26.11 R49.2 | length 2.1
  Bottom Layer w0.25: HL26.11 R49.2
NetHL26_12: HL26.12 R54.2 | length 2.1
  Bottom Layer w0.25: HL26.12 R54.2
NetHL26_15: HL26.15 R42.2 | length 2.1
  Bottom Layer w0.25: HL26.15 R42.2
NetHL26_16: HL26.16 R41.2 | length 2.1
  Bottom Layer w0.25: HL26.16 R41.2
NetHL26_17: HL26.17 R47.2 | length 2.1
  Bottom Layer w0.25: HL26.17 R47.2
NetHL26_18: HL26.18 R46.2 | length 2.1
  Bottom Layer w0.25: HL26.18 R46.2
NetHL27_1: HL27.1 R61.2 | length 2.1
  Bottom Layer w0.25: R61.2 HL27.1
NetHL27_2: HL27.2 R60.2 | length 2.1
  Bottom Layer w0.25: R60.2 HL27.2
NetHL27_3: HL27.3 R59.2 | length 2.1
  Bottom Layer w0.25: R59.2 HL27.3
NetHL27_4: HL27.4 R64.2 | length 2.1
  Bottom Layer w0.25: R64.2 HL27.4
NetHL27_5: HL27.5 R69.2 | length 2.1
  Bottom Layer w0.25: R69.2 HL27.5
NetHL27_6: HL27.6 R68.2 | length 2.1
  Bottom Layer w0.25: R68.2 HL27.6
NetHL27_7: HL27.7 R71.2 | length 2.1
  Bottom Layer w0.25: R71.2 80.705,47.405 HL27.7
NetHL27_8: HL27.8 R67.2 | length 2.1
  Bottom Layer w0.25: R67.2 HL27.8
NetHL27_9: HL27.9 R72.2 | length 2.1
  Bottom Layer w0.25: R72.2 HL27.9
NetHL27_10: HL27.10 R66.2 | length 1.9
  Bottom Layer w0.25: HL27.10 R66.2
NetHL27_11: HL27.11 R65.2 | length 2.1
  Bottom Layer w0.25: HL27.11 R65.2
NetHL27_12: HL27.12 R70.2 | length 2.1
  Bottom Layer w0.25: HL27.12 R70.2
NetHL27_15: HL27.15 R58.2 | length 2.1
  Bottom Layer w0.25: HL27.15 R58.2
NetHL27_16: HL27.16 R57.2 | length 2.1
  Bottom Layer w0.25: HL27.16 R57.2
NetHL27_17: HL27.17 R63.2 | length 2.1
  Bottom Layer w0.25: HL27.17 R63.2
NetHL27_18: HL27.18 R62.2 | length 2.1
  Bottom Layer w0.25: HL27.18 R62.2
NetHL28_1: HL28.1 R77.2 | length 2.1
  Bottom Layer w0.25: R77.2 HL28.1
NetHL28_2: HL28.2 R76.2 | length 2.1
  Bottom Layer w0.25: R76.2 HL28.2
NetHL28_3: HL28.3 R75.2 | length 2.1
  Bottom Layer w0.25: R75.2 HL28.3
NetHL28_4: HL28.4 R80.2 | length 2.1
  Bottom Layer w0.25: R80.2 HL28.4
NetHL28_5: HL28.5 R85.2 | length 2.1
  Bottom Layer w0.25: R85.2 HL28.5
NetHL28_6: HL28.6 R84.2 | length 2.1
  Bottom Layer w0.25: R84.2 HL28.6
NetHL28_7: HL28.7 R87.2 | length 2.1
  Bottom Layer w0.25: R87.2 106.33,47.405 HL28.7
NetHL28_8: HL28.8 R83.2 | length 2.1
  Bottom Layer w0.25: R83.2 HL28.8
NetHL28_9: HL28.9 R88.2 | length 2.1
  Bottom Layer w0.25: R88.2 HL28.9
NetHL28_10: HL28.10 R82.2 | length 1.9
  Bottom Layer w0.25: HL28.10 R82.2
NetHL28_11: HL28.11 R81.2 | length 2
  Bottom Layer w0.25: HL28.11 R81.2
NetHL28_12: HL28.12 R86.2 | length 2
  Bottom Layer w0.25: HL28.12 R86.2
NetHL28_15: HL28.15 R74.2 | length 2
  Bottom Layer w0.25: HL28.15 R74.2
NetHL28_16: HL28.16 R73.2 | length 2
  Bottom Layer w0.25: HL28.16 R73.2
NetHL28_17: HL28.17 R79.2 | length 2
  Bottom Layer w0.25: HL28.17 R79.2
NetHL28_18: HL28.18 R78.2 | length 2
  Bottom Layer w0.25: HL28.18 R78.2
Stb: DD1.12 DD2.12 DD3.12 DD4.12 DD5.12 DD6.12 DD7.12 DD8.12 DD9.12 DD10.12 DD11.12 XS1.3 | length 179
  Top Layer w0.25: v1(8.75,12.501) v1(8.75,25.001) 8.75,37.477 v1(8.75,37.501) ; 8.75,36.25 8.75,53.75 v1(10.625,55.625) 16.875,61.875 v1(17.5,61.875) 17.5,62.62 18.005,63.125 28.75,63.125 v1(30,61.875) v1(43.125,61.875) 43.125,62.5 43.75,63.125 54.495,63.125 55.625,61.995 v1(55.625,61.875) v1(68.75,61.875) 68.75,62.5 69.375,63.125 80,63.125 v1(81.25,61.875) 94.375,61.875 v1(94.405,61.905) 94.405,62.65 94.88,63.125 106.25,63.125 v1(106.875,62.5)
  Bottom Layer w0.25: XS1.3 4.5,55.625 v1(10.625,55.625) ; DD3.12 v1(8.75,37.501) ; DD1.12 v1(8.75,12.501) ; DD2.12 v1(8.75,25.001) ; DD4.12 v1(17.5,61.875) ; DD5.12 v1(30,61.875) ; DD6.12 v1(43.125,61.875) ; DD7.12 v1(55.625,61.875) ; DD8.12 v1(68.75,61.875) ; DD9.12 v1(81.25,61.875) ; DD10.12 94.405,60.03 v1(94.405,61.905) ; DD11.12 v1(106.875,62.5)
pads on no net: DD4.10 DD5.10 DD6.10 DD7.10 DD8.10 DD9.10 DD10.10 DD11.9 DD11.10 XS1.4 XS1.P1 XS1.P2

## Polygon pours and split planes (outlines as drawn)
GND on Bottom Layer "NONET_L01_P-001" (solid, remove dead copper, pour order 0): 0,75 0,0 125,0 125,75
GND on Top Layer "NONET_L01_P-001" (solid, remove dead copper, pour order 1): 0,75 0,0 125,0 125,75

## Keep-outs
Keep-Out Layer:
  the board outline again, w1

## Silkscreen, mask and mechanical layers (free items; w line width, h text height)
Top Overlay:
  text "1.8" at 18.209,39.629 h1
  text "3.5" at 30.625,39.629 h1
  text "7" at 44.042,39.63 h1
  text "10" at 56.125,39.63 h1
  text "14" at 68.625,39.63 h1
  text "18" at 81.125,39.63 h1
  text "21" at 93.709,39.63 h1
  text "24" at 106.042,39.63 h1
  text "28" at 18.542,27.129 h1
  text "GEN" at 30.542,27.129 h1
  text "VFO A" at 42.042,27.13 h1
  text "VFO B" at 54.542,27.13 h1
  text "MWR" at 68.042,27.13 h1
  text "RIT" at 80.625,27.13 h1
  text "SPLIT" at 92.126,27.13 h1
  text "USB" at 105.542,27.13 h1
  text "KN2" at 43.042,14.63 h1
  text "RX" at 56.042,14.63 h1
  text "TX" at 68.542,14.63 h1
  text "PCH1" at 80.209,14.63 h1
  text "PCH2" at 92.542,14.63 h1
  text "TX CAT" at 104.043,14.63 h1
  text "LSB" at 18.042,14.629 h1
  text "KN1" at 30.709,14.629 h1